# Altium PCB Ups_Design2.PcbDoc (part 2 of 2)
Units mm, origin at the board's own origin, x right, y up, seen from the top; angles counter-clockwise.
Board outline 72 x 110 mm, 2 copper layers (Top Layer, Bottom Layer); 102 components, 59 nets, 324 pads, 32 vias.
Unrouted connection lines stored in the file: 207.
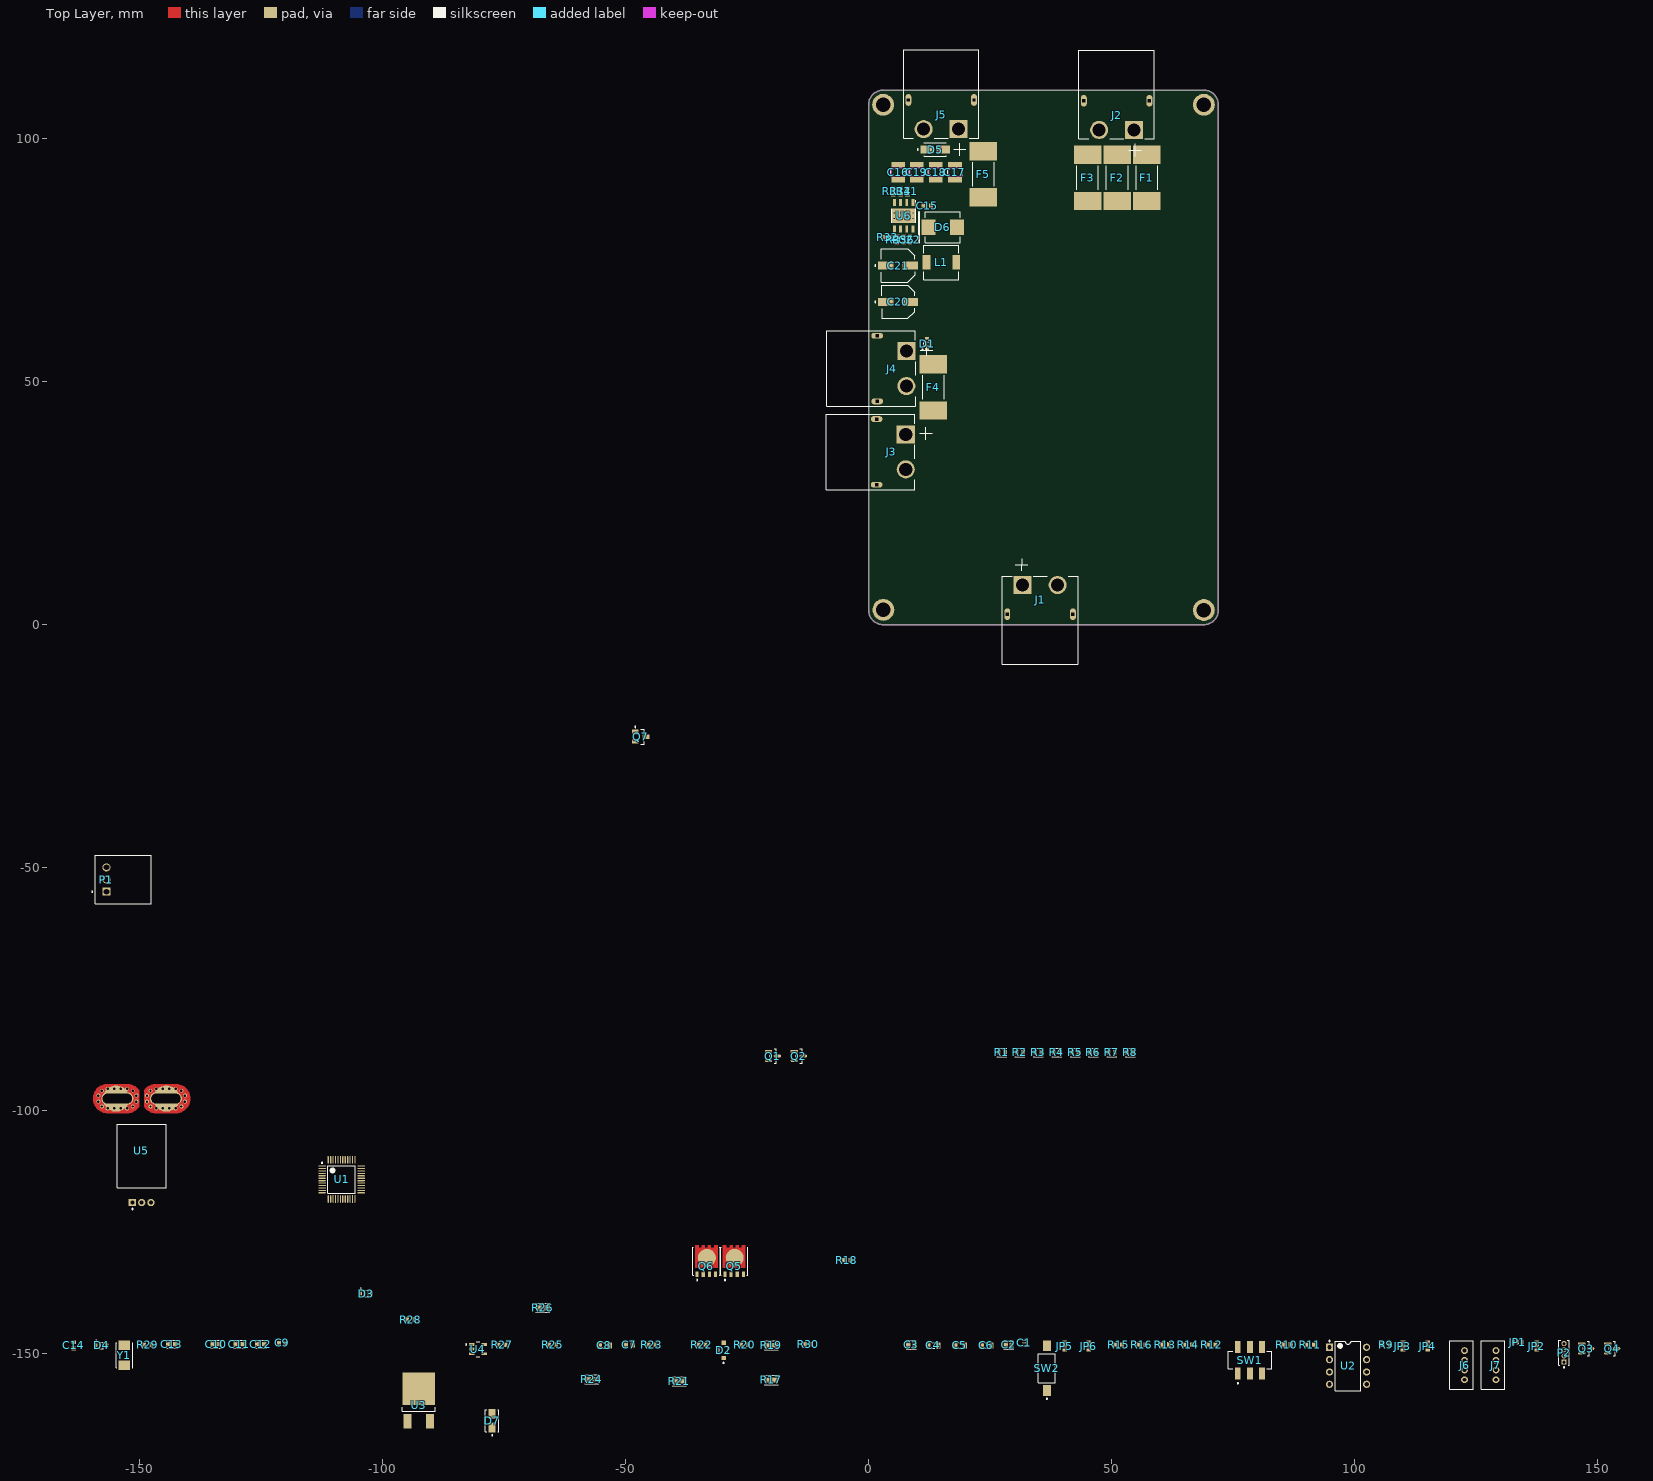
[diagram p0: Top Layer view]

## Via types
v1: diameter 0.8, hole 0.5, Top Layer to Bottom Layer, 32 vias

## Nets (pads, with @x,y where several pads share a name; then routed paths per layer and width w, separated by ;. In a path a pad name is that pad's centre, name@x,y a point inside that pad or via, vN(x,y) a via of type N, cw(c..) or ccw(c..) an arc to the next point about the centre after c; other vN are vias at no path point) (continued)
GND: C1.2 C3.2 C4.2 C5.2 C6.2 C7.1 C8.2 C9.1 C10.1 C11.2 C12.2 C13.2 C14.1 C16.1 C17.1 C18.1 C19.1 C20.1 C21.1 C22.1 D2.2 D5.1 D6.2 D7.1 J2.2 J3.2 J4.2 J5.2 J6.4 J7.4 P1.3 P2.4 Q5.1 Q5.2 Q5.3 Q6.1 Q6.2 Q6.3 Q7.2 R11.1 R16.2 R18.2 R20.2 R22.1 R23.2 R25.2 R27.2 R29.1 R30.1 R33.1 R34.1 R35.1 R36.1 SW2.1 U1.8 U1.23 U1.35 U1.47 U2.4 U3.4 U4.2 U5.2 U6.7 U6.9
HALL_SWITCH: C2.2 D2.1 P1.2 Q5.4 Q6.4 R22.2
HSE_IN: C9.2 U1.5 Y1.2
HSE_OUT: C14.2 U1.6 Y1.1
NetC2_1: C2.1 R14.2
NetC15_1: C15.1 D6.1 L1.1 U6.8
NetC15_2: C15.2 U6.1
NetC22_2: C22.2 R36.2 U6.6
NetD1_1: D1.1 F4.2
NetD5_2: D5.2 F5.2 J5.1
NetF1_2: F1.2 F2.2 F3.2 J2.1
NetJ6_1: J6.1 JP1.2
NetJ7_1: J7.1 JP2.2
NetR9_1: R9.1 R11.2 U2.2
NetR12_2: R12.2 R16.1 U2.3
NetR13_2: R13.2 SW1.6
NetR33_2: R33.2 U6.4
RST: C1.1 R15.1 SW2.2 U1.7
RX1: JP5.2 U1.43
RX1-H: Q4.3 R8.2
RX1-L: Q4.2 R6.2
RX1_H: J6.3 JP5.3
RX1_L: JP5.1
SCL1: JP4.2 U1.45
SCL1-H: Q3.3 R4.2
SCL1-L: Q3.2 R2.2
SCL1_H: J7.3 JP4.3
SCL1_L: JP4.1
SDA1: JP6.2 U1.46
SDA1-H: Q1.3 R3.2
SDA1-L: Q1.2 R1.2
SDA1_H: J7.2 JP6.3
SDA1_L: JP6.1
SWCLK: P2.3 U1.34
SWDIO: P2.2 U1.37
TX1: JP3.2 U1.42
TX1-H: Q2.3 R7.2
TX1-L: Q2.2 R5.2
TX1_H: J6.2 JP3.3
TX1_L: JP3.1
pads on no net: J1.S1 J1.S2 J2.S1 J2.S2 J3.S1 J3.S2 J4.S1 J4.S2 J5.S1 J5.S2 R10.2 SW1.1 SW1.2 SW1.3 SW1.4 SW1.5 U1.1 U1.2 U1.3 U1.4 U1.10 U1.18 U1.19 U1.20 U1.22 U1.25 U1.26 U1.27 U1.28 U1.29 U1.30 U1.31 U1.32 U1.33 U1.38 U1.39 U1.40 U1.41 U2.1 U2.5 U2.8 U4.4 U6.V

## Keep-outs
Keep-Out Layer:
  the board outline again, w0.254